# Altium PCB Adafruit SCD-41.PcbDoc
Units mil, origin at the board's own origin, x right, y up, seen from the top; angles counter-clockwise.
Board outline 1000 x 900 mil, 2 copper layers (Top, Bottom); 27 components, 13 nets, 86 pads, 24 vias.
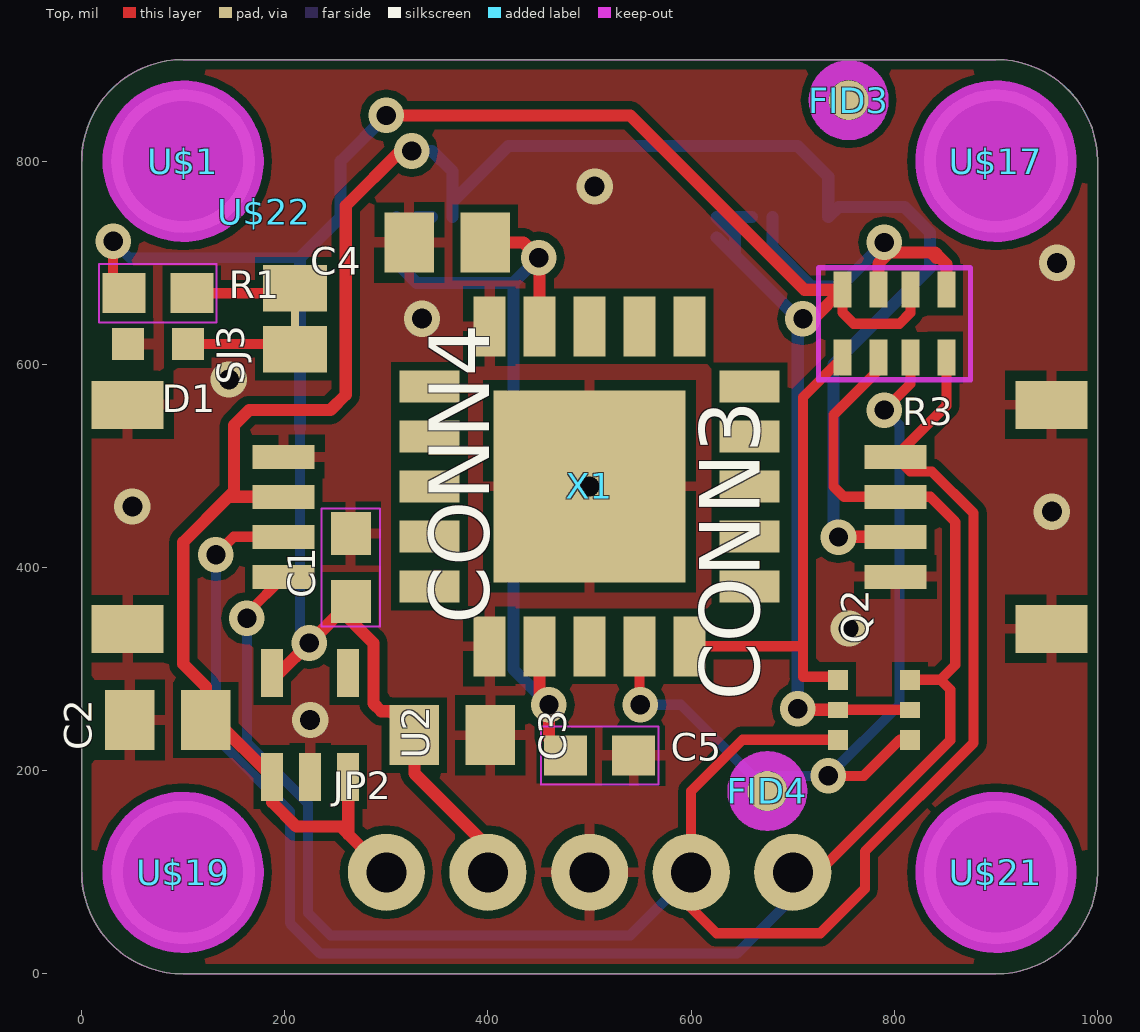
[diagram p0: Top view]
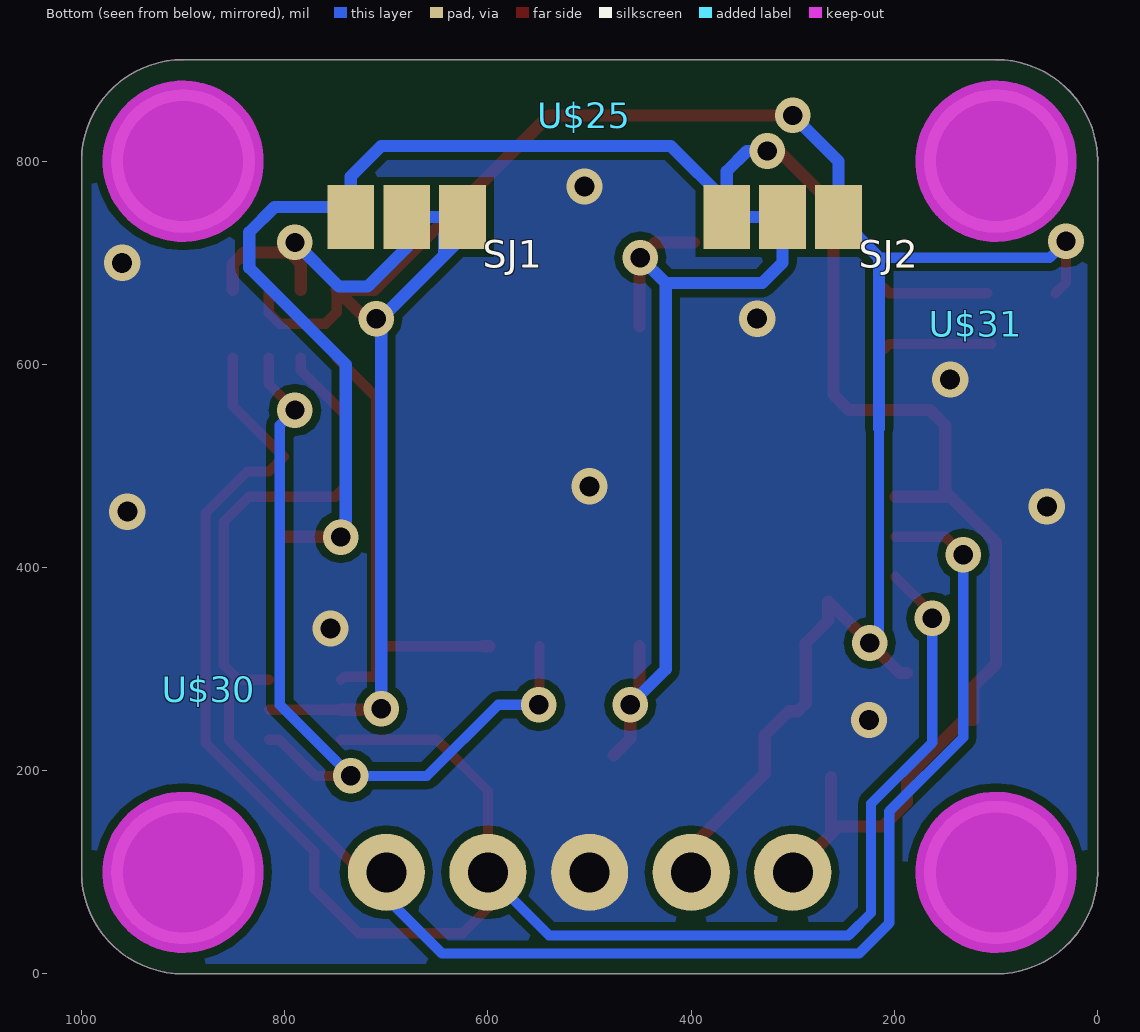
[diagram p1: Bottom view, seen from below]

## Layer stack, top to bottom
Top Solder: solder mask 0.4, Solder Resist, Dk 3.5
Top: signal copper 1.378
Dielectric 1: dielectric 12.6, FR-4, Dk 4.8
Bottom: signal copper 1.378
Bottom Solder: solder mask 0.4, Solder Resist, Dk 3.5

## Board outline
100,900 ccw(c100,800) 0,800 0,100 ccw(c100,100) 100,0 900,0 ccw(c900,100) 1000,100 1000,800 ccw(c900,800) 900,900

## Design rules (kind name [scope] priority, off if disabled: settings)
BoardOutlineClearance mdCopperDimension [All] p1: gap=10 ignorepadtopadclearanceinfootprint=FALSE except(0: Arc-SplitContinuation Track-SplitContinuation SMDPad-SplitContinuation THPad-SplitContinuation Via-SplitContinuation Fill-SplitContinuation Poly-SplitContinuation Region-SplitContinuation Text-SplitContinuation)
Clearance "Clearance (Same Net)" [All] p1: gap=8 ignorepadtopadclearanceinfootprint=FALSE
Clearance [All] p2: gap=8 ignorepadtopadclearanceinfootprint=FALSE
HoleSize HoleSize_For_NetClass_lowpower [InNetClass('lowpower')] p1: absolutevalues=TRUE maxlimit=19 minlimit=19 maxpercent=80.000 minpercent=20.000
HoleSize HoleSize_For_NetClass_highpower [InNetClass('highpower')] p2: absolutevalues=TRUE maxlimit=19 minlimit=19 maxpercent=80.000 minpercent=20.000
HoleSize [All] p3: absolutevalues=TRUE maxlimit=100000 minlimit=15.5 maxpercent=80.000 minpercent=20.000
HoleToHoleClearance mdDrill [All] p1: gap=8 allowstackedmicrovias=TRUE
MinimumSolderMaskSliver [All] p1 off: minsoldermaskwidth=10
PasteMaskExpansion Expansion_SMDPaste_OFF [InPadClass('SMDPaste_OFF')] p1: expansion=0
PasteMaskExpansion mlMinCreamFrame [All] p2: expansion=0
PolygonConnect PolygonConnect_For_PolygonThermal_ON_Width100000_Gap100000 [InPolygonClass('PolygonThermal_ON_Width100000_Gap100000') vs Not IsVia] p1: connectstyle=Relief reliefconductorwidth=10 reliefentries=4 polygonreliefangle="90 Angle" airgapwidth=10
PolygonConnect ThermalVias [IsVia] p2: connectstyle=Direct reliefconductorwidth=10 reliefentries=4 polygonreliefangle="90 Angle" airgapwidth=10
PolygonConnect [All] p3: connectstyle=Relief reliefconductorwidth=10 reliefentries=4 polygonreliefangle="90 Angle" airgapwidth=10
RoutingVias [All] p1: holewidth=15.5 width=31.5 viastyle="Through Hole" minholewidth=15.5 minwidth=31.5 maxholewidth=100 maxwidth=100
SolderMaskExpansion Expansion_SMDSolder_OFF [InPadClass('SMDSolder_OFF')] p1: expansion=0 istentingtop=FALSE
SolderMaskExpansion mlMinStopFrame [All] p2: expansion=2 istentingtop=FALSE
Width Width_For_NetClass_lowpower [InNetClass('lowpower')] p1: maxlimit=10 minlimit=10 preferedwidth=10
Width Width_For_NetClass_highpower [InNetClass('highpower')] p2: maxlimit=24 minlimit=10 preferedwidth=12
Width [All] p3: maxlimit=10 minlimit=8 preferedwidth=8
26 further rules are at their usual default settings.

## Classes and differential pairs
polygon class PolygonThermal_ON_Width100000_Gap100000: Polygon_1_Net_GND Polygon_2_Net_GND
pad class SMDSolder_OFF: SJ1-1 SJ1-2 SJ1-3 SJ2-1 SJ2-2 SJ2-3 SJ3-1 SJ3-2 SJ3-WIRE
pad class SMDPaste_OFF: FID3-1 FID4-1 SJ1-1 SJ1-2 SJ1-3 SJ2-1 SJ2-2 SJ2-3 SJ3-1 SJ3-2 SJ3-WIRE X1-1 X1-2 X1-3 X1-4 X1-5 X1-6 X1-7 X1-8 X1-9 X1-10 X1-11 X1-12 X1-13 X1-14 X1-15 X1-16 X1-17 X1-18 X1-19 X1-20 X1-P$1
net class lowpower: 3.3V N$3
net class highpower: GND N$2 VCC

## Components (designator, comment, footprint, x,y, rotation, side; value= is the part's Value field where it differs from the comment)
C1 "0.1uF" 0603-NO 265,400 r90 top
C2 "10uF" 0805-NO 85,250 r180 top
C3 "10uF" 0805-NO 365,235 r0 top
C4 "10uF" 0805-NO 360,720 r180 top
C5 "0.1uF" 0603-NO 510,215 r0 top
CONN3 "" JST_SH4 900,450 r90 top
CONN4 "" JST_SH4 100,450 r270 top
D1 "GREEN" CHIPLED_0603_NOOUTLINE 75,620 r90 top
FID3 "" FIDUCIAL_1MM 755,860 r0 top
FID4 "" FIDUCIAL_1MM 675,180 r0 top
JP2 "" 1X05_ROUND_76 500,100 r0 top
Q2 "BSS138" SOT363 780,260 r90 top
R1 "10K" 0603-NO 75,670 r0 top
R3 "10K" RESPACK_4X0603 800,640 r180 top
SJ1 "" SOLDERJUMPER_2WAY_OPEN_NOPASTE 680,745 r0 bottom
SJ2 "" SOLDERJUMPER_2WAY_OPEN_NOPASTE 310,745 r0 bottom
SJ3 "" SOLDERJUMPER_CLOSEDWIRE 210,645 r90 top
U2 "AP2112K-3.3" SOT23-5 225,245 r0 top
U$1 "" MOUNTINGHOLE_3.0_PLATEDTHIN 100,800 r0 top
U$17 "" MOUNTINGHOLE_3.0_PLATEDTHIN 900,800 r0 top
U$19 "" MOUNTINGHOLE_3.0_PLATEDTHIN 100,100 r0 top
U$21 "" MOUNTINGHOLE_3.0_PLATEDTHIN 900,100 r0 top
U$22 "" ADAFRUIT_3.5MM 180,750 r0 top
U$25 "" PCBFEAT-REV-040 505,845 r180 bottom
U$30 "" STEMMAQT 875,280 r90 bottom
U$31 "" STEMMAQT 120,640 r270 bottom
X1 "" SCD41 500,480 r0 top

## Footprints (in the part's own frame and the unit in brackets; to place one, negate y for a bottom-side part, rotate by r counter-clockwise, add the part's x,y. Pads: shape width x height; smd on the part's side, far side on the other; paste and mask are expansions set on the pad)
1X05_ROUND_76 [mil] "1X05_ROUND_76"
  round 76 hole 39.37: 1(-200,0) 2(-100,0) 3(0,0) 4(100,0) 5(200,0)
0603-NO [mm] "0603-NO"
  rect 1.075x1 smd: 1(-0.85,0) 2(0.85,0)
  Top keep-out lines w0.051: -1.473,0.729 -1.473,-0.729 1.473,-0.729 1.473,0.729 -1.473,0.729
0805-NO [mil] "0805-NO"
  rect 48.82x59.06 smd: 1(-37.4,0) 2(37.4,0)
ADAFRUIT_3.5MM [mil] "ADAFRUIT_3.5MM"
CHIPLED_0603_NOOUTLINE [mil] "CHIPLED_0603_NOOUTLINE"
  rect 31.5x31.5 smd: A(0,-29.53) C(0,29.53)
FIDUCIAL_1MM [mm] "FIDUCIAL_1MM"
  rrect100% 1x1 smd paste+0: 1(0,0)
  Top keep-out lines w0.483: -0.75,0 ccw(c0,0) 0,-0.75 ccw(c0,0) 0.75,0 ccw(c0,0) 0,0.75 ccw(c0,0) -0.75,0
  Top keep-out lines w0.5: -0.75,0 ccw(c0,0) 0,-0.75 ccw(c0,0) 0.75,0 ccw(c0,0) 0,0.75 ccw(c0,0) -0.75,0
JST_SH4 [mil] "JST_SH4"
  rect 23.62x61.02 smd: 1(-59.06,98.98) 2(-19.69,98.98) 3(19.69,98.98) 4(59.06,98.98)
  rect 47.24x70.87 smd: MT1(-110.24,-54.57) MT2(110.24,-54.57)
MOUNTINGHOLE_3.0_PLATEDTHIN [mm] "MOUNTINGHOLE_3.0_PLATEDTHIN"
  round 3.6 hole 3: P$1(0,0)
  Top keep-out circle w2.032: c0,0 r1
  Top keep-out circle w2.032: c0,0 r1
  Top keep-out circle w2.032: c0,0 r1
  Bottom keep-out circle w2.032: c0,0 r1
  Bottom keep-out circle w2.032: c0,0 r1
PCBFEAT-REV-040 [mil] "PCBFEAT-REV-040"
RESPACK_4X0603 [mil] "RESPACK_4X0603"
  rect 17.72x35.43 smd: 1(-51.18,-33.46) 2(-15.75,-33.46) 3(15.75,-33.46) 4(51.18,-33.46) 5(51.18,33.46) 6(15.75,33.46) 7(-15.75,33.46) 8(-51.18,33.46)
  Top keep-out lines w5: 74.8,55.12 74.8,-55.12 -74.8,-55.12 -74.8,55.12 74.8,55.12
SCD41 [mil] "SCD41"
  rect 59.06x31.5 smd paste+0: 1(-157.48,98.43) 2(-157.48,49.21) 3(-157.48,0) 4(-157.48,-49.21) 5(-157.48,-98.43) 11(157.48,-98.43) 12(157.48,-49.21) 13(157.48,0) 14(157.48,49.21) 15(157.48,98.43)
  rect 31.5x59.06 smd paste+0: 6(-98.43,-157.48) 7(-49.21,-157.48) 8(0,-157.48) 9(49.21,-157.48) 10(98.43,-157.48) 16(98.43,157.48) 17(49.21,157.48) 18(0,157.48) 19(-49.21,157.48) 20(-98.43,157.48)
  rect 188.98x188.98 smd paste+0: P$1(0,0)
SOLDERJUMPER_2WAY_OPEN_NOPASTE [mil] "SOLDERJUMPER_2WAY_OPEN_NOPASTE"
  rect 46x63 smd paste+0 mask+0: 1(-55,0) 2(0,0) 3(55,0)
SOLDERJUMPER_CLOSEDWIRE [mil] "SOLDERJUMPER_CLOSEDWIRE"
  rect 46x63 smd paste+0 mask+0: 1(-30,0) 2(30,0)
  rect 25x8 smd paste+0 mask+0: WIRE(0,0)
SOT23-5 [mil] "SOT23-5"
  rect 21.65x47.24 smd: 1(-37.4,-51.19) 2(0,-51.19) 3(37.4,-51.19) 4(37.4,51.19) 5(-37.4,51.19)
SOT363 [mil] "SOT363"
  rect 19.69x19.69 smd: 1(-29.53,-35.43) 3(29.53,-35.43) 4(29.53,35.43) 6(-29.53,35.43)
  rect 15.75x19.69 smd: 2(0,-35.43) 5(0,35.43)
STEMMAQT [mil] "STEMMAQT"

## Part data
C1 C5 R1: library part 0603-NO, PackageName=0603-NO
C2 C3 C4: library part 0805-NO, PackageName=0805-NO
CONN3 CONN4: library part JST_SH4, PackageName=JST_SH4
D1: library part CHIPLED_0603_NOOUTLINE, PackageName=CHIPLED_0603_NOOUTLINE
FID3 FID4: library part FIDUCIAL_1MM, PackageName=FIDUCIAL_1MM
JP2: library part 1X05_ROUND_76, PackageName=1X05_ROUND_76
Q2: library part SOT363, PackageName=SOT363
R3: library part RESPACK_4X0603, PackageName=RESPACK_4X0603
SJ1 SJ2: library part SOLDERJUMPER_2WAY_OPEN_NOPASTE, PackageName=SOLDERJUMPER_2WAY_OPEN_NOPASTE
SJ3: library part SOLDERJUMPER_CLOSEDWIRE, PackageName=SOLDERJUMPER_CLOSEDWIRE
U2: library part SOT23-5, PackageName=SOT23-5
U$1 U$17 U$19 U$21: library part MOUNTINGHOLE_3.0_PLATEDTHIN, PackageName=MOUNTINGHOLE_3.0_PLATEDTHIN
U$22: library part ADAFRUIT_3.5MM, PackageName=ADAFRUIT_3.5MM
U$25: library part PCBFEAT-REV-040, PackageName=PCBFEAT-REV-040
U$30 U$31: library part STEMMAQT, PackageName=STEMMAQT
X1: library part SCD41, PackageName=SCD41

## Via types
v1: diameter 35/35 (per signal layer), hole 19, Top to Bottom, 15 vias
v2: diameter 35.69/35.69 (per signal layer), hole 19.69, Top to Bottom, 9 vias

## Nets (pads, with @x,y where several pads share a name; then routed paths per layer and width w, separated by ;. In a path a pad name is that pad's centre, name@x,y a point inside that pad or via, vN(x,y) a via of type N, cw(c..) or ccw(c..) an arc to the next point about the centre after c; other vN are vias at no path point)
3.3V: C1.1 C3.1 JP2.2 Q2.2 Q2.5 R1.1 R3.2 R3.4 SJ1.1 SJ2.1 U2.5 | length 2731.1
  Top w10: v1(31.07,721.07) 31.07,680.47 R1.1 ; JP2.2@383.82,100 JP2.2 JP2.2@422.4,122.4 ; Q2.5 Q2.2 ; R3.4 748.82,651.18 760,640 805,640 815.75,650.75 R3.2
  Top w12: U2.5 194.65,296.19 v1(224.23,325.77) C1.1 265,347.83 287.23,325.61 287.23,266.33 295,258.56 304.04,258.56 C3.1 327.6,197.4 400,125 JP2.2 ; v1(300,845) 540,845 711.54,673.46 R3.4 720.35,645 v1(710,645) ; v1(705,260.97) 705.97,260 Q2.5
  Bottom w10: v1(31.07,721.07) 47.14,705 215,705 ; 215,537.14 215,517.14 215,335 v1(224.23,325.77)
  Bottom w12: 215,537.14 215,705 SJ2.1 255,800 v1(300,845) ; SJ1.1@625,725 v1@705,645 ; SJ1.1 643,727 643,707.7 705,645.7 v1@705,645 ; v1(705,260.97) v1@705,645 ; v1(710,645) 710,640 v1@705,645
GND: C1.2 C2.2 C3.2 C4.2 C5.2 CONN3.1 CONN3.MT1 CONN3.MT2 CONN4.1 CONN4.MT1 CONN4.MT2 D1.C JP2.3 U2.2 X1.6 X1.20 X1.P$1
  other v2: 225,250 755,340 955,455 50,460 500,480 145,585 335,645 960,700 505,775
N$1: D1.A SJ3.1 SJ3.WIRE | length 107.6
  Top w10: D1.A 205.12,620 210,615.12 SJ3.1
N$2: R3.1 R3.3 SJ1.2 | length 322.3
  Top w12: R3.3 784.25,699.25 795,710 v1@800,710 ; v1(790,720) v1@800,710 ; 840,710 845,705 ; R3.1 851.18,698.82 845,705 ; v1@800,710 836.18,710 841.18,705 845,705
  Bottom w12: SJ1.2 680,715 718.5,676.5 746.5,676.5 v1(790,720)
N$3: C4.1 C5.1 SJ2.2 X1.7 X1.19 | length 878
  Top w12: C4.1 435,720 v1(450,705) 450.79,704.21 X1.19 ; X1.7 450.79,274.21 v1(460,265) 460,231.54 C5.1
  Bottom w12: SJ2.2 310,700 330,680 425,680 ; v1(450,705) 425,680 ; v1(460,265) 425,300 425,680
N$4: R1.2 SJ3.2 | length 103.7
  Top w10: R1.2 205.12,670 210,674.88 SJ3.2
N$5:  | length 15
  Bottom w12: 645,745 660,745
N$6:  | length 15
  Bottom w12: 330,745 345,745
SCL: CONN3.4 CONN4.4 JP2.4 Q2.6 R3.8 | length 1896
  Top w10: v1(162.77,350) 162.77,354.74 CONN4.4 ; Q2.6 650.47,230.47 600,180 JP2.4 600,65 625,40 727.13,40 771,83.88 771,120.54 878,227.54 878,453.42 836.92,494.5 815.58,494.5 CONN3.4 851.18,559.21 R3.8
  Bottom w10: v1(162.77,350) 162.77,227.68 223,167.46 223,60 245,38 540,38 600,98 JP2.4
SCL_3V: Q2.1 R3.7 X1.9 | length 824.4
  Top w10: X1.9 549.21,265.79 v1(550,265) ; v1(735,195) 769.96,195 805.43,230.47 Q2.1 ; v1(790,555) 815.75,580.75 R3.7
  Bottom w10: v1(550,265) 590,265 660,195 v1(735,195) 805,265 805,540 v1(790,555)
SDA: CONN3.3 CONN4.3 JP2.5 Q2.3 R3.6 | length 1765.3
  Top w10: v1(132.27,412.73) 149.86,430.32 CONN4.3 ; JP2.5 725,100 855,230 855,280 845.47,289.53 ; R3.6 784.25,594.25 740,550 740,480 750.32,469.69 CONN3.3 835.32,469.69 860,445 860,304.06 845.47,289.53 ; Q2.3 845.47,289.53
  Bottom w10: v1(132.27,412.73) 132.27,232.73 205,160 205,50 235,20 645,20 700,75 JP2.5
SDA_3V: Q2.4 R3.5 X1.10 | length 477.5
  Top w10: X1.10@605,322.52 710,322.52 ; Q2.4 741.57,292.52 710,292.52 710,322.52 ; R3.5 710,567.72 710,322.52
  Top w12: X1.10 X1.10@605,322.52
VCC: C2.1 CONN3.2 CONN4.2 JP2.1 SJ1.3 SJ2.3 U2.1 U2.3 | length 2184.4
  Top w12: CONN4.2 144.69,469.69 ; U2.3 262.4,137.6 JP2.1 255,145 211.6,145 187.6,169 U2.1 131.41,250 C2.1 122.4,282.6 100,305 100,425 144.69,469.69 ; v1(325,810) 313.86,810 260,756.14 260,570 245,555 165,555 150,540 150,475 144.69,469.69 ; v1(745,430) 745.32,430.32 CONN3.2
  Bottom w12: v1(325,810) 345,810 365,790 SJ2.3@365,760 ; SJ2.3 SJ2.3@365,760 ; v1(745,430) 740,435 740,600 835,695 835,730 810,755 745,755 SJ1.3 735,785 705,815 420,815 SJ2.3@365,760
pads on no net: FID3.1 FID4.1 U2.4 U$1.P$1 U$17.P$1 U$19.P$1 U$21.P$1 X1.1 X1.2 X1.3 X1.4 X1.5 X1.8 X1.11 X1.12 X1.13 X1.14 X1.15 X1.16 X1.17 X1.18

## Polygon pours and split planes (outlines as drawn)
GND on Top "Polygon_1_Net_GND" (solid, remove dead copper, pour order 1): -5,905 1005,905 1005,-5 -5,-5
GND on Bottom "Polygon_2_Net_GND" (solid, remove dead copper, pour order 0): -5,905 1005,905 1005,-5 -5,-5

## Keep-outs
Keep-Out Layer:
  the board outline again, w0

## Silkscreen, mask and mechanical layers (free items; w line width, h text height)
Dimension:
  the board outline again, w0
tPlace:
  text "SCD41" at 372.04,819.1 h55.25
  text "CO2/Temp/Hum" at 331.21,753.89 h38.25
  text "Sensor" at 449.11,686.39 h38.25
  text "on" at 160,605 h34 r90
  text "3Vo" at 354.92,143.25 h34
  text "SCL" at 549.92,143.25 h34
  text "VIN" at 257.75,13.25 h34
  text "GND" at 454.92,13.25 h34
  text "SDA" at 654.92,13.25 h34
bPlace:
  text "3V" at 236.24,808.49 h38.25 r270
  text "Vin" at 351.24,807.56 h38.25 r270
  text "3V" at 606.24,808.49 h38.25 r270
  text "Vin" at 726.24,807.56 h38.25 r270
  text "Sensor" at 785.51,649.28 h38.25
  text "I2C" at 353.15,644.28 h38.25
  text "Power" at 766.39,581.78 h38.25
  text "logic" at 388.2,576.78 h38.25
  text "SCD4X CO2 Sensor" at 825.22,497.81 h42.5
  text "Photoacoustic CO2," at 812.19,428.03 h38.25
  text "Temp & Humidity" at 761.2,360.53 h38.25
  text "I2C Addr 0x62" at 729.34,293.03 h38.25
  text "VLogic/Vcc: 3-5VDC" at 798.65,8.93 h34

## Dimensions
520,0 to 485,900 on tFinish
1000,360 to 0,245 on tFinish
900,100 to 100,100 on tFinish
500,100 to 500,800 on tFinish

## Text inside footprints (layer, text, board x,y; h text height)
CONN3: Top Value "JST SH 4" at 1057.72,318.9 h34 r90
CONN4: Top Value "JST SH 4" at -57.72,581.1 h34 r270
SJ1: tDocu "3" at 780,770 h42.5 r180; tDocu "1" at 550,770 h42.5 r180
SJ2: tDocu "3" at 410,770 h42.5 r180; tDocu "1" at 180,770 h42.5 r180
U$25: tPlace ">REV" at 519,825 h34